# EAGLE board circuit_for_fab (EAGLE 5.11)
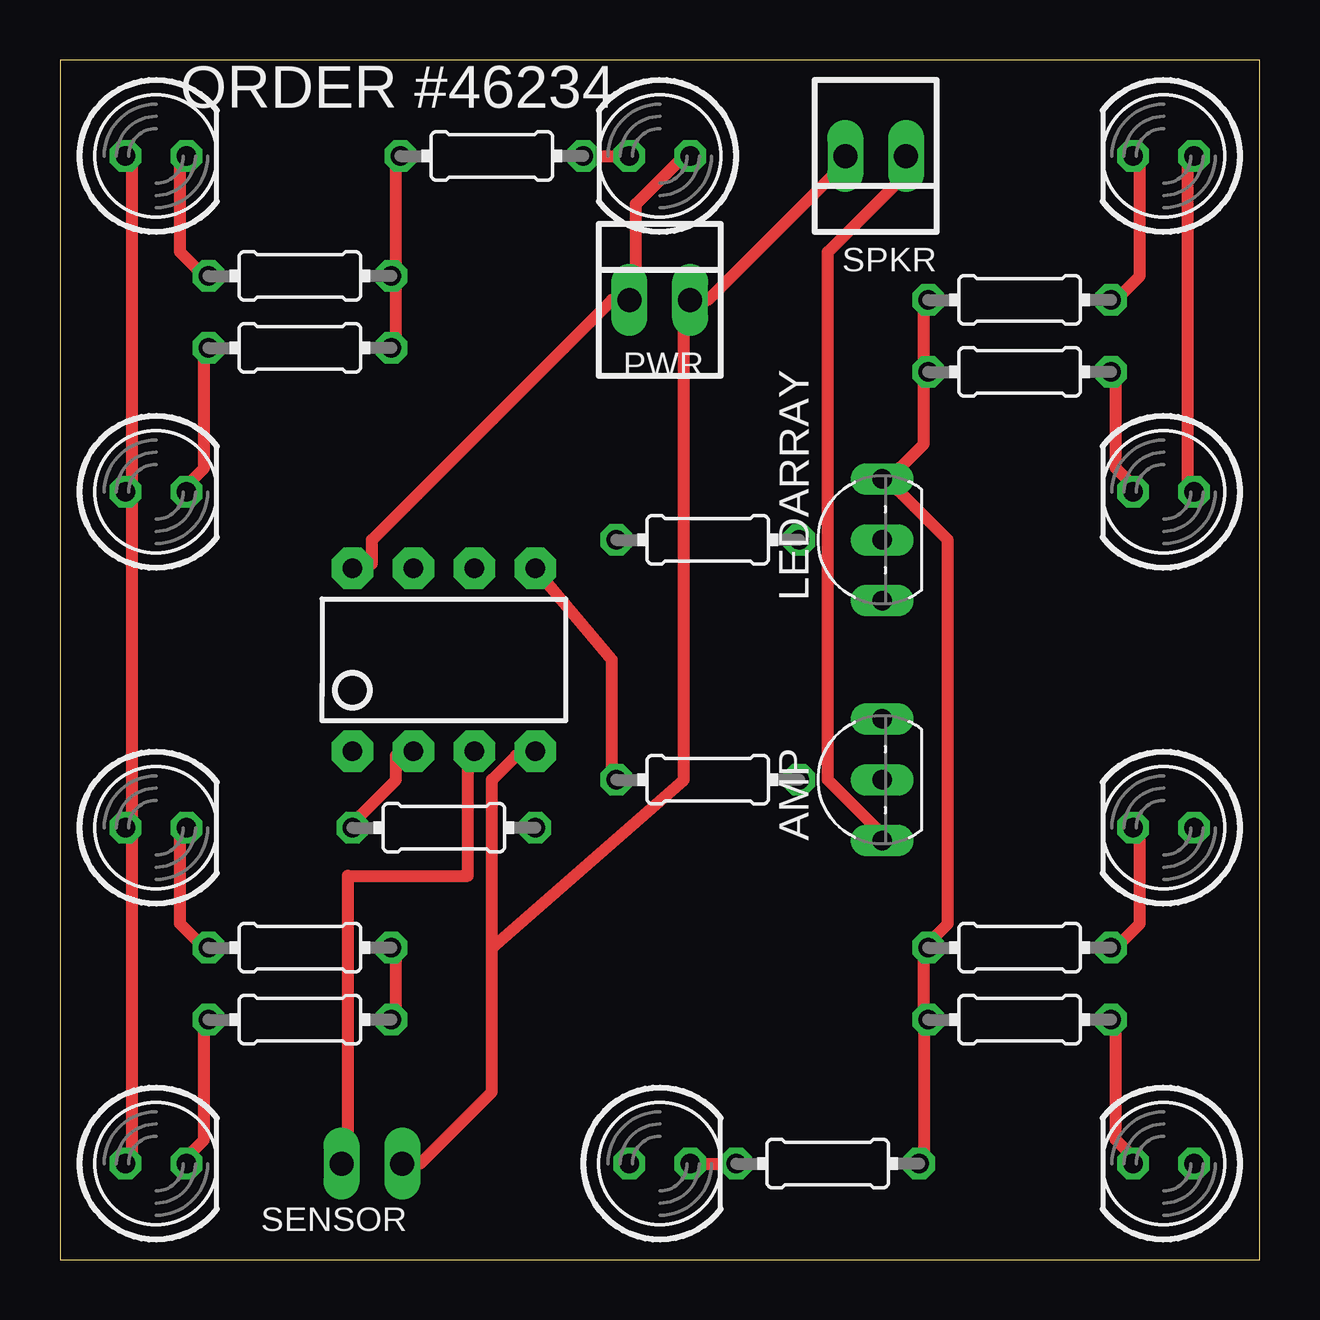
[diagram p0: board, top side]
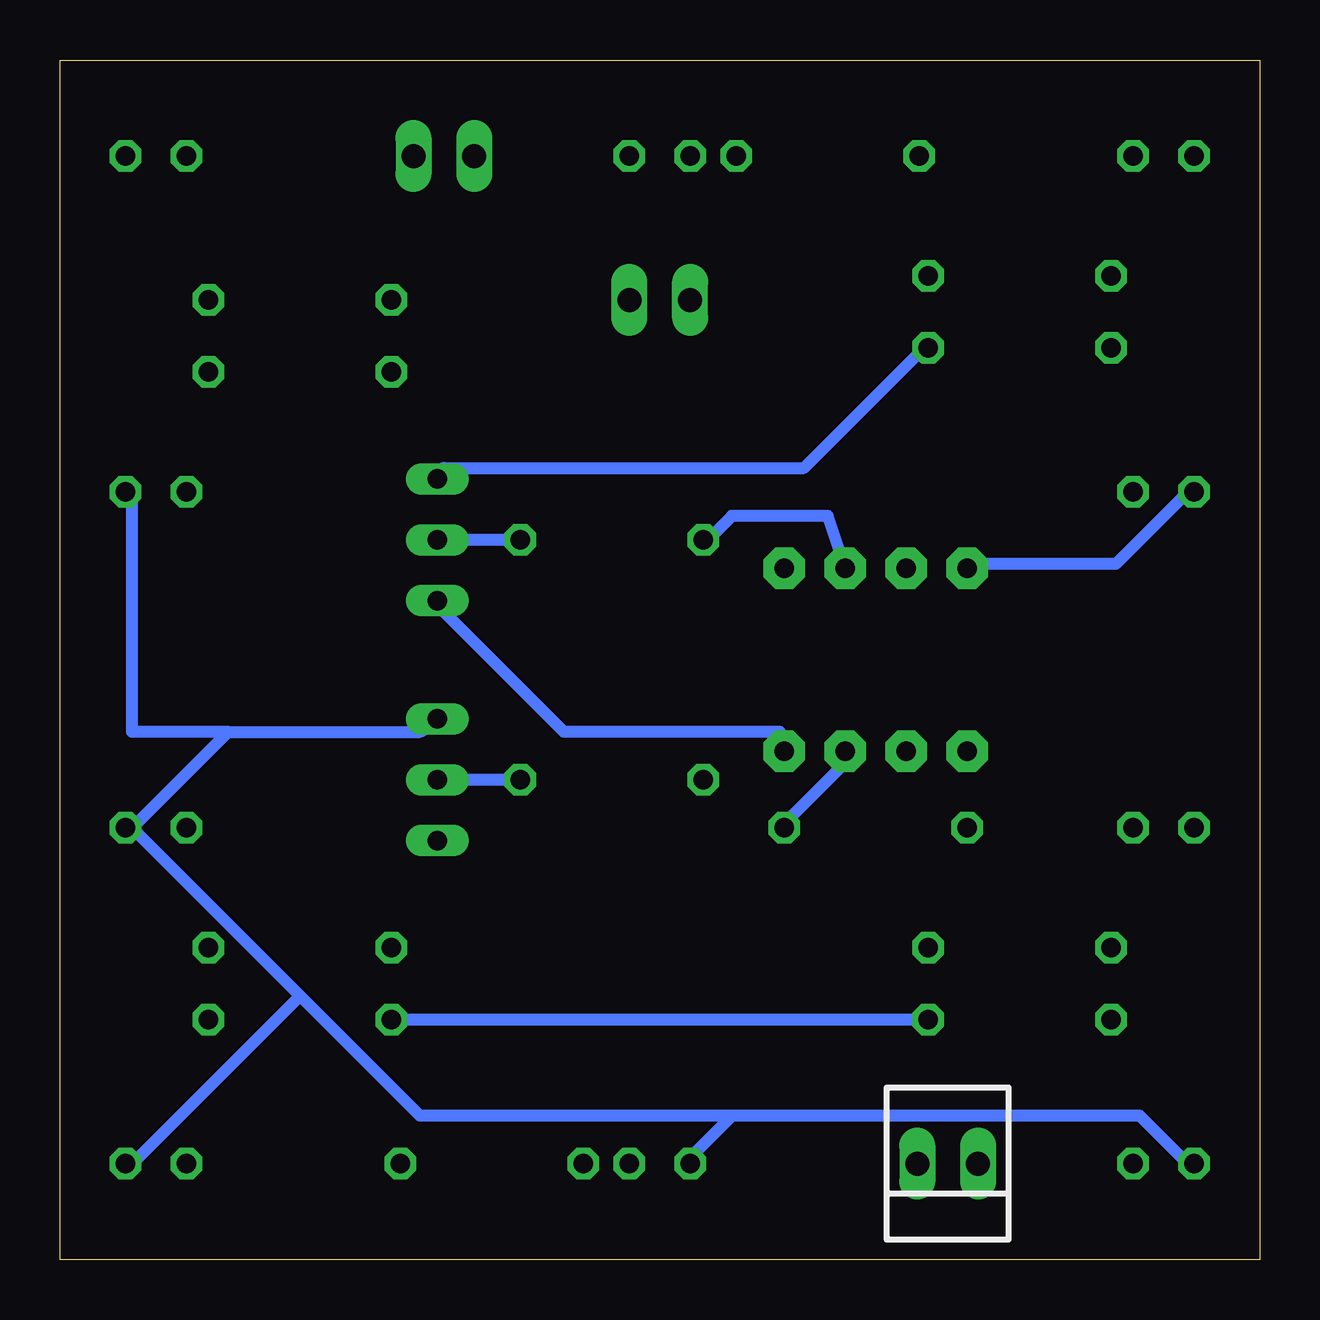
[diagram p1: board, bottom side, seen from below]

Size 50 x 50 mm. Coordinates in mm from the lower left corner, seen from the top.
Outline: 0,0 50,0 50,50 0,50 0,0
Copper layers (1*16): Top 0.035mm / dielectric 1.5mm / Bottom 0.035mm
Design rules "default *": minimum track width 20mil, minimum drill 24mil, track to track 8mil, track to pad 8mil, pad to pad 8mil, via to via 8mil, smd to smd 8mil, copper to edge 40mil, drill to drill 8mil, minimum pad ring 10mil, minimum via ring 8mil, stop-mask expansion 4mil, vias tented up to drill 0mil, thermal gap 10mil

## Footprints (pad centres in the part's own frame; a part is rotated, then mirrored left to right if it is on the bottom)
TO92-EBC = drill 0.813 long: B 0,-1.27; C 2.54,-1.27; E -2.54,-1.27
LED5MM = drill 0.813 octagon: A -1.27,0; K 1.27,0
22-23-2021 = drill 1 long: 1 -1.27,0; 2 1.27,0
0204/7 = drill 0.813 octagon: 1 -3.81,0; 2 3.81,0
DIP08 = drill 0.813 pad 1.727 octagon: 1 -3.81,-3.81; 2 -1.27,-3.81; 3 1.27,-3.81; 4 3.81,-3.81; 5 3.81,3.81; 6 1.27,3.81; 7 -1.27,3.81; 8 -3.81,3.81

## Placement (x,y rotation side)
AMP  [TO92-EBC]  33,20 90 top
LED1  [LED5MM]  4,46 0 top
LED2  [LED5MM]  4,4 0 top
LED3  [LED5MM]  46,46 180 top
LED4  [LED5MM]  46,4 180 top
LED5  [LED5MM]  25,46 180 top
LED6  [LED5MM]  25,4 0 top
LED7  [LED5MM]  4,32 0 top
LED8  [LED5MM]  4,18 0 top
LED9  [LED5MM]  46,32 180 top
LED10  [LED5MM]  46,18 180 top
LEDARRAY  [TO92-EBC]  33,30 90 top
PWR  22-23-2021  [22-23-2021]  25,40 0 top
R1  100  [0204/7]  27,30 0 top
R2  100  [0204/7]  27,20 0 top
R3  10M  [0204/7]  16,18 180 top
R4  68  [0204/7]  10,41 0 top
R5  68  [0204/7]  18,46 0 top
R6  68  [0204/7]  40,10 0 top
R7  68  [0204/7]  40,40 0 top
R8  68  [0204/7]  10,10 180 top
R9  68  [0204/7]  32,4 0 top
R10  68  [0204/7]  10,38 0 top
R11  68  [0204/7]  10,13 0 top
R12  68  [0204/7]  40,37 180 top
R13  68  [0204/7]  40,13 180 top
SENSOR  22-23-2021  [22-23-2021]  13,4 180 bottom
SPKR  22-23-2021  [22-23-2021]  34,46 180 top
U$1  ATTINY85  [DIP08]  16,25 0 top

## Library data of the parts
AMP LEDARRAY = transistor
LED1-LED10 = led
PWR SENSOR SPKR = con-molex; MF: MOLEX; MPN: 22-23-2021; OC_FARNELL: 1462926; OC_NEWARK: 25C3832
R1-R13 = rcl
U$1 = SparkFun

## Nets
+5V: AMP.C LED1.A LED2.A LED3.A LED4.A LED5.A LED6.A LED7.A LED8.A LED9.A LED10.A PWR.1 U$1.8
GNDA: LEDARRAY.E PWR.2 SENSOR.2 SPKR.2 U$1.4
N$1: R3.2 U$1.2
N$2: LED1.K R4.1
N$3: R1.1 U$1.6
N$4: AMP.B R2.2
N$5: LEDARRAY.C R4.2 R5.1 R6.1 R7.1 R8.1 R9.2 R10.2 R11.2 R12.2 R13.2
N$6: LEDARRAY.B R1.2
N$7: R2.1 U$1.5
N$8: AMP.E SPKR.1
N$10: LED5.K R5.2
N$11: LED4.K R6.2
N$12: LED3.K R7.2
N$13: LED2.K R8.2
N$14: LED6.K R9.1
N$15: LED7.K R10.1
N$16: LED8.K R11.1
N$17: LED9.K R12.1
N$18: LED10.K R13.1
N$19: R3.1 SENSOR.1 U$1.3

## Tracks (layer width: path | path; a pad name or v marks a point on that pad's centre or on a via)
+5V
  Top 0.508: LED5.A 26,46 24,44 24,40 PWR.1 23,40 13,30 13,29 U$1.8 | 3,32 3,46 LED1.A | LED9.A 47,32 47,46 LED3.A | 3,18 3,4 LED2.A | 3,18 3,32 | 3,32 LED7.A | 3,18 LED8.A
  Bottom 0.508: LED7.A 3,32 6,29 12,29 U$1.8 | 47,18 43,22 | 43,22 35,22 AMP.C | 43,22 47,22 47,32 LED9.A | 22,6 24,4 LED6.A | 22,6 5,6 3,4 LED2.A | 22,6 35,6 40,11 | 40,11 47,18 | 47,18 LED10.A | 40,11 47,4 LED4.A
GNDA
  Top 0.508: SPKR.2 33,46 27,40 PWR.2 26,40 26,20 18,13 | 18,13 18,20 19,21 U$1.4 | 18,13 18,7 15,4 SENSOR.2
  Bottom 0.508: LEDARRAY.E 34,27 29,22 20,22 U$1.4
N$1
  Top 0.508: R3.2 12,18 14,20 14,21 U$1.2
N$2
  Top 0.508: R4.1 6,41 5,42 5,46 LED1.K
N$3
  Bottom 0.508: R1.1 23,30 22,31 18,31 U$1.6
N$4
  Bottom 0.508: R2.2 AMP.B
N$5
  Top 0.508: R8.1 14,10 14,13 R11.2 | 36,10 36,4 R9.2 | 36,10 36,13 | R6.1 36,10 | 14,41 14,38 R10.2 | 14,41 14,46 R5.1 | 14,41 R4.2 | 36,37 36,34 35,33 LEDARRAY.C 35,32 37,30 37,14 36,13 | 36,37 36,40 R7.1 | 36,37 R12.2 | 36,13 R13.2
  Bottom 0.508: R8.1 R6.1 | R10.2 14,38 19,33 34,33 LEDARRAY.C
N$6
  Bottom 0.508: R1.2 LEDARRAY.B
N$7
  Top 0.508: R2.1 23,20 23,25 U$1.5
N$8
  Top 0.508: AMP.E 34,18 32,20 32,42 35,45 35,46 SPKR.1
N$10
  Top 0.508: R5.2 LED5.K 24,46
N$11
  Top 0.508: LED4.K 45,4 44,5 44,10 R6.2
N$12
  Top 0.508: R7.2 44,40 45,41 45,46 LED3.K
N$13
  Top 0.508: LED2.K 5,4 6,5 6,10 R8.2
N$14
  Top 0.508: 26,4 LED6.K R9.1
N$15
  Top 0.508: LED7.K 5,32 6,33 6,38 R10.1
N$16
  Top 0.508: R11.1 6,13 5,14 5,18 LED8.K
N$17
  Top 0.508: LED9.K 45,32 44,33 44,37 R12.1
N$18
  Top 0.508: R13.1 44,13 45,14 45,18 LED10.K
N$19
  Top 0.508: SENSOR.1 12,4 12,16 17,16 17,21 U$1.3
  Bottom 0.508: R3.1 20,18 17,21 U$1.3

## Text on the board
_tsilk: ORDER #46234